# EAGLE board main V4.1 v38 (EAGLE 9.7.0), part 1 of 2
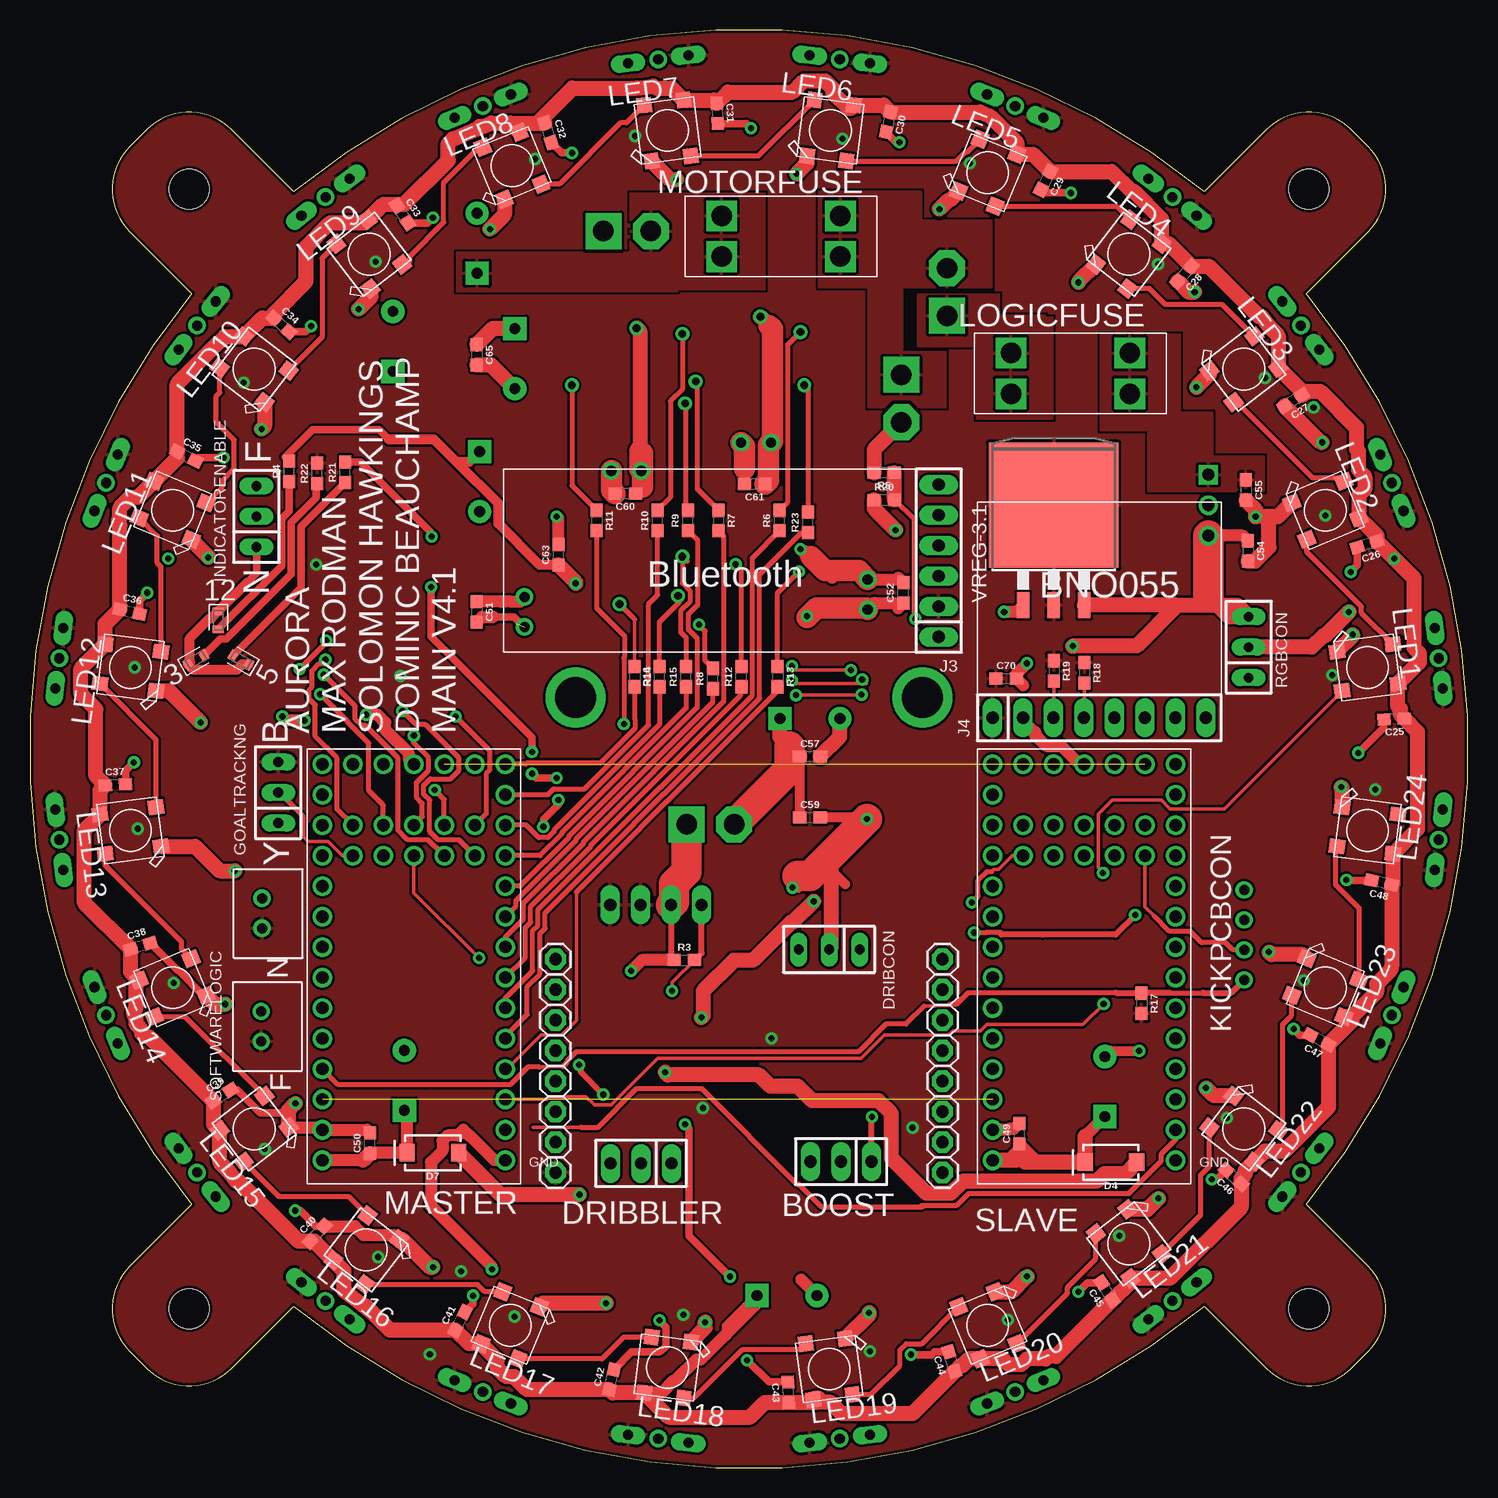
[diagram p0: board, top side]
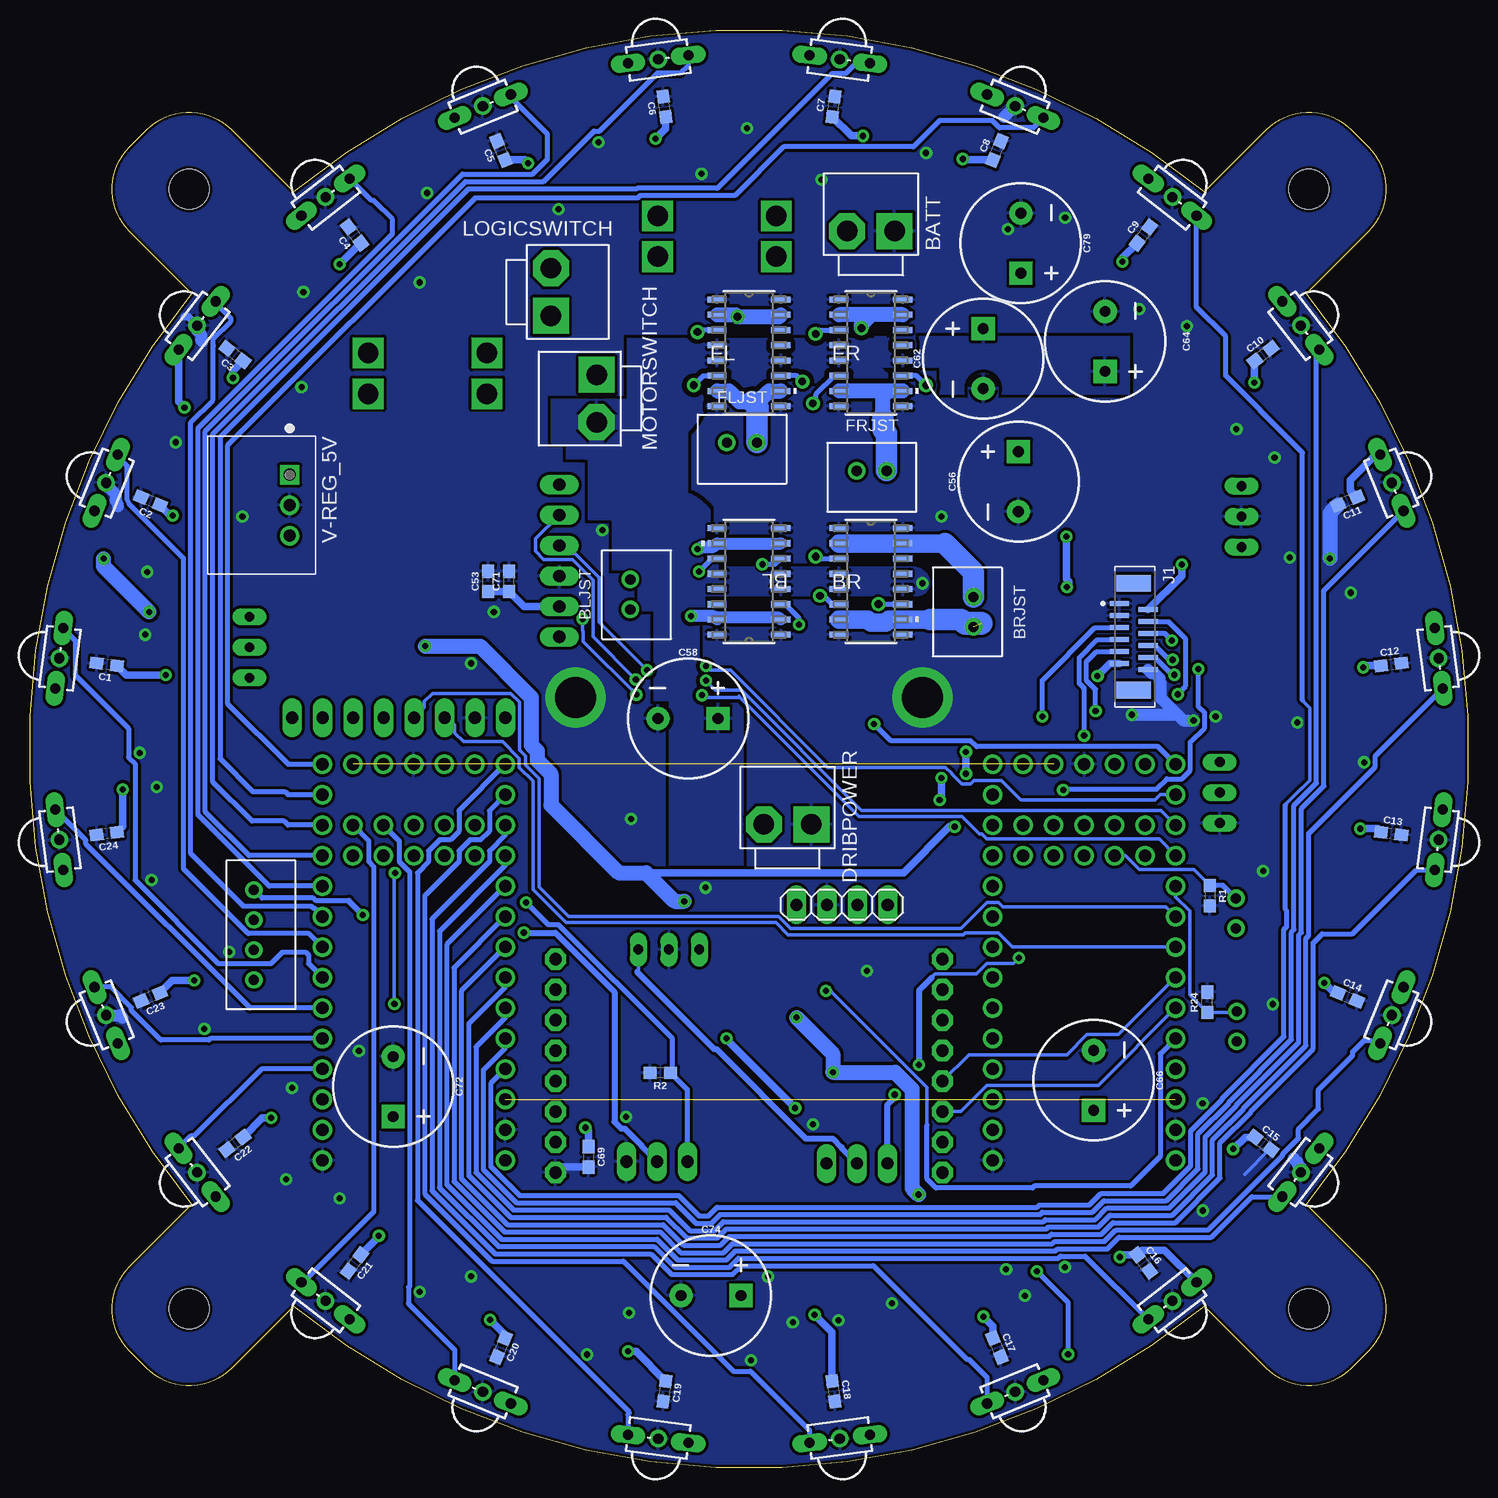
[diagram p1: board, bottom side, seen from below]

Size 119.87 x 119.87 mm. Coordinates in mm from the lower left corner, seen from the top.
Outline: 13.48,21.97 8.32,16.8 arc90 8.32,9.73 9.73,8.32 arc90 16.8,8.32 21.97,13.48 arc79 97.91,13.48 103.07,8.32 arc90 110.14,8.32 111.56,9.73 arc90 111.56,16.8 106.39,21.97 arc79 106.39,97.91 111.56,103.07 arc90 111.56,110.14 110.14,111.56 arc90 103.07,111.56 97.91,106.39 arc79 21.97,106.39 16.8,111.56 arc90 9.73,111.56 8.32,110.14 arc90 8.32,103.07 13.48,97.91 arc79 13.48,21.97
Copper layers (1*16): Top 0.035mm / dielectric 1.5mm / Bottom 0.035mm
Design rules "SparkFun": minimum track width 8mil, minimum drill 20mil, track to track 8mil, track to pad 8mil, pad to pad 8mil, via to via 8mil, smd to smd 8mil, copper to edge 10mil, drill to drill 8mil, minimum pad ring 12mil, minimum via ring 10mil, stop-mask expansion 4mil, vias tented up to drill 25mil, thermal gap 10mil
Holes 3.3 mm at 106.61,13.27 13.27,106.61 13.27,13.27 106.61,106.61

## Footprints (pad centres in the part's own frame; a part is rotated, then mirrored left to right if it is on the bottom)
B2P-VH = drill 1.7 pad 3 square: 1 -1.98,0 | drill 1.7 pad 3 octagon: 2 1.98,0
VNH7070-ASTR = smd 1.6 x 0.508: 1 -2.654,4.445; 2 -2.654,3.175; 3 -2.654,1.905; 4 -2.654,0.635; 5 -2.654,-0.635; 6 -2.654,-1.905; 7 -2.654,-3.175; 8 -2.654,-4.445; 9 2.654,-4.445; 10 2.654,-3.175; 11 2.654,-1.905; 12 2.654,-0.635; 13 2.654,0.635; 14 2.654,1.905; 15 2.654,3.175; 16 2.654,4.445
B2B-XH-A = drill 0.84: 1 0,0; 2 2.5,0
SIP-100-03-40Y = drill 1.016 long: 1 -2.54,0; 2 0,0; 3 2.54,0
0603 = smd 1.1 x 1: 1 -0.85,0; 2 0.85,0
CPOL-RADIAL-5MM-10MM-KIT = drill 0.9 pad 1.93 square: + 2.5,0 | drill 0.9 pad 1.93: - -2.5,0
LEDC1608X55N_FLAT-Y = smd 0.612 x 0.912: A 0.75,0; C -0.75,0
SMA-DIODE = smd 1.27 x 1.47: A -2.15,0; C 2.15,0
SIP-100-03-32Y = drill 0.813 long: 1 -2.54,0; 2 0,0; 3 2.54,0
MINICAST = drill 0.85 long: 1 0,2.54; 3 0,-2.54 | drill 0.85: 2 0,0
TE_1-1734742-2 = smd 0.4 x 1.6: 1 -2.75,-1.2; 2 -2.25,1.2; 3 -1.75,-1.2; 4 -1.25,1.2; 5 -0.75,-1.2; 6 -0.25,1.2; 7 0.25,-1.2; 8 0.75,1.2; 9 1.25,-1.2; 10 1.75,1.2; 11 2.25,-1.2; 12 2.75,1.2 | smd 1.4 x 2.9: S1 -4.45,0; S2 4.45,0
B4B-XH-A = drill 0.84: 1 0,0; 2 2.5,0; 3 5,0; 4 7.5,0
SIP-100-06-40Y = drill 1.016 long: 1 -6.35,0; 2 -3.81,0; 3 -1.27,0; 4 1.27,0; 5 3.81,0; 6 6.35,0
SIP-100-08-40Y = drill 1.016 long: 1 -8.89,0; 2 -6.35,0; 3 -3.81,0; 4 -1.27,0; 5 1.27,0; 6 3.81,0; 7 6.35,0; 8 8.89,0
1X04 = drill 1.016 long: 1 -3.81,0; 2 -1.27,0; 3 1.27,0; 4 3.81,0
WS2812B-NARROW = smd 1.3 x 1.2: 1-VDD 2.35,-1.65; 2-DOUT 2.35,1.65; 3-GND -2.35,1.65; 4-DIN -2.35,-1.65
3568-FUSEHOLDER = drill 1.702 square: 1 0,3.404; 2 0,0; 3 9.906,0; 4 9.906,3.404
MODULE_DEV-15583 = drill 1.02: 0 -7.62,13.97; 1 -7.62,11.43; 2 -7.62,8.89; 3 -7.62,6.35; 3.3V_1 -2.54,-16.51; 3.3V_2 7.62,11.43; 4 -7.62,3.81; 5 -7.62,1.27; 6 -7.62,-1.27; 7 -7.62,-3.81; 8 -7.62,-6.35; 9 -7.62,-8.89; 10 -7.62,-11.43; 11 -7.62,-13.97; 12 -7.62,-16.51; 13 7.62,-16.51; 14 7.62,-13.97; 15 7.62,-11.43; 16 7.62,-8.89; 17 7.62,-6.35; 18 7.62,-3.81; 19 7.62,-1.27; 20 7.62,1.27; 21 7.62,3.81; 22 7.62,6.35; 23 7.62,8.89; 24 -5.08,-11.43; 25 -5.08,-8.89; 26 -2.54,-11.43; 27 -2.54,-8.89; 28 0,-11.43; 29 0,-8.89; 30 2.54,-11.43; 31 2.54,-8.89; 32 5.08,-11.43; 33 5.08,-8.89; G1 -7.62,16.51; G2 0,-16.51; G3 7.62,13.97; ON-OFF 5.08,-16.51; PGM 2.54,-16.51; VBAT -5.08,-16.51; VIN 7.62,16.51
OPENMV3 = drill 1.016 pad 1.778 octagon: 11 1.651,19.304; 12 1.651,16.764; 13 1.651,14.224; 14 1.651,11.684; 15 1.651,9.144; 16 1.651,6.604; 17 1.651,4.064; 18 1.651,1.524; 21 33.909,19.304; 22 33.909,16.764; 23 33.909,14.224; 24 33.909,11.684; 25 33.909,9.144; 26 33.909,6.604; 27 33.909,4.064; 28 33.909,1.524
CONV_V7805-2000 = drill 1 square: 1 -2.54,2.35 | drill 1: 2 0,2.35; 3 2.54,2.35
LINEAR_TO263-3 = smd 1.067 x 2.159: 1 -2.54,-5.791; 2 0,-5.791; 3 2.54,-5.791 | smd 10.8 x 10.41: TAB 0,2.54

## Placement (x,y rotation side)
BATT  B2P-VH-B  [B2P-VH]  49.78,103.12 180 bottom
BL  VNH7070-ASTR  [VNH7070-ASTR]  59.94,73.91 180 bottom
BLJST  [B2B-XH-A]  69.83,71.57 90 bottom
BOOST  F-1X03-SIP-100-40Y  [SIP-100-03-40Y]  67.61,25.55 180 top
BR  VNH7070-ASTR  [VNH7070-ASTR]  49.78,73.91 0 bottom
BRJST  [B2B-XH-A]  41.22,72.61 270 bottom
C1  0.1uF  [0603]  113.48,66.99 172.5 bottom
C2  0.1uF  [0603]  109.83,80.6 157.5 bottom
C3  0.1uF  [0603]  102.78,92.81 142.5 bottom
C4  0.1uF  [0603]  92.81,102.78 127.5 bottom
C5  0.1uF  [0603]  80.6,109.83 112.5 bottom
C6  0.1uF  [0603]  66.99,113.48 97.5 bottom
C7  0.1uF  [0603]  52.89,113.48 82.5 bottom
C8  0.1uF  [0603]  39.27,109.83 67.5 bottom
C9  0.1uF  [0603]  27.06,102.78 52.5 bottom
C10  0.1uF  [0603]  17.1,92.81 37.5 bottom
C11  0.1uF  [0603]  10.05,80.6 202.5 bottom
C12  0.1uF  [0603]  6.4,66.99 7.5 bottom
C13  0.1uF  [0603]  6.4,52.89 352.5 bottom
C14  0.1uF  [0603]  10.05,39.27 337.5 bottom
C15  0.1uF  [0603]  17.1,27.06 322.5 bottom
C16  0.1uF  [0603]  27.06,17.1 307.5 bottom
C17  0.1uF  [0603]  39.27,10.05 292.5 bottom
C18  0.1uF  [0603]  52.89,6.4 277.5 bottom
C19  0.1uF  [0603]  66.99,6.4 262.5 bottom
C20  0.1uF  [0603]  80.6,10.05 247.5 bottom
C21  0.1uF  [0603]  92.81,17.1 232.5 bottom
C22  0.1uF  [0603]  102.78,27.06 217.5 bottom
C23  0.1uF  [0603]  109.83,39.27 202.5 bottom
C24  0.1uF  [0603]  113.48,52.89 187.5 bottom
C25  1uF  [0603]  113.71,62.43 182.5 top
C26  1uF  [0603]  111.47,77 197.5 top
C27  1uF  [0603]  105.3,88.99 212.5 top
C28  1uF  [0603]  96.24,99.55 227.5 top
C29  1uF  [0603]  84.66,107.32 242.5 top
C30  1uF  [0603]  71.54,112.2 257.5 top
C31  1uF  [0603]  57.28,112.92 272.5 top
C32  1uF  [0603]  43.19,111.31 287.5 top
C33  1uF  [0603]  31.04,104.5 302.5 top
C34  1uF  [0603]  20.96,95.29 317.5 top
C35  1uF  [0603]  13.03,84.35 332.5 top
C36  1uF  [0603]  8.31,71.38 347.5 top
C37  1uF  [0603]  7.11,56.97 2.5 top
C38  1uF  [0603]  9.2,43.51 17.5 top
C39  1uF  [0603]  16.01,31.04 32.5 top
C40  1uF  [0603]  23.95,19.54 47.5 top
C41  1uF  [0603]  35.85,12.24 62.5 top
C42  1uF  [0603]  48.49,7.36 77.5 top
C43  1uF  [0603]  63.23,6.32 92.5 top
C44  1uF  [0603]  76.84,8.88 107.5 top
C45  1uF  [0603]  89.78,14.74 122.5 top
C46  1uF  [0603]  100.34,24.27 137.5 top
C47  1uF  [0603]  107.48,35.69 152.5 top
C48  1uF  [0603]  112.68,48.81 167.5 top
C49  0.1uF  [0603]  82.48,27.87 90 top
C50  0.1uF  [0603]  28.35,27.08 90 top
C51  0.1uF  [0603]  37.24,71.37 270 top
C52  0.1uF  [0603]  72.8,72.95 90 top
C53  0.1uF  [0603]  81.69,73.91 90 bottom
C54  22uF  [0603]  101.53,76.45 270 top
C55  10uF  [0603]  101.37,81.53 270 top
C56  470uf  [CPOL-RADIAL-5MM-10MM-KIT]  37.48,82.23 90 bottom
C57  0.1uF  [0603]  65.02,59.3 0 top
C58  470uf  [CPOL-RADIAL-5MM-10MM-KIT]  65.02,62.48 0 bottom
C59  0.1uF  [0603]  65.02,54.22 0 top
C60  0.1uF  [0603]  49.62,81.21 180 top
C61  0.1uF  [0603]  60.41,82 180 top
C62  470uf  [CPOL-RADIAL-5MM-10MM-KIT]  40.41,92.48 90 bottom
C63  0.1uF  [0603]  44.06,76.13 90 top
C64  470uf  [CPOL-RADIAL-5MM-10MM-KIT]  30.25,93.91 270 bottom
C65  0.1uF  [0603]  37.24,92.8 270 top
C66  470uF  [CPOL-RADIAL-5MM-10MM-KIT]  31.2,32.31 270 bottom
C69  0.1uF  [0603]  73.32,25.93 270 bottom
C70  0.1uF  [0603]  81.37,65.81 0 top
C71  0.1uF  [0603]  79.94,73.91 90 bottom
C72  470uF  [CPOL-RADIAL-5MM-10MM-KIT]  89.6,31.8 270 bottom
C74  470uF  [CPOL-RADIAL-5MM-10MM-KIT]  63.11,14.38 0 bottom
C79  470uF  [CPOL-RADIAL-5MM-10MM-KIT]  37.28,102.1 270 bottom
D1  [LEDC1608X55N_FLAT-Y]  15.7,70.67 270 top
D2  [LEDC1608X55N_FLAT-Y]  17.57,67.37 150 top
D3  [LEDC1608X55N_FLAT-Y]  13.83,67.37 30 top
D4  1A/40V/500mV  [SMA-DIODE]  90.1,25.49 180 top
D7  1A/40V/500mV  [SMA-DIODE]  33.58,26.28 180 top
DRIBBLER  F-1X03-SIP-100-40Y  [SIP-100-03-40Y]  50.94,25.39 180 top
DRIBCON  [SIP-100-03-32Y]  66.62,43.22 180 top
DRIBPOWER  [B2P-VH]  56.72,53.66 180 bottom
FL  VNH7070-ASTR  [VNH7070-ASTR]  59.94,92.96 0 bottom
FLJST  [B2B-XH-A]  61.78,85.48 0 bottom
FR  VNH7070-ASTR  [VNH7070-ASTR]  49.78,92.96 0 bottom
FRJST  [B2B-XH-A]  50.96,83.13 0 bottom
GOALTRACKNG  F-1X03-SIP-100-32Y  [SIP-100-03-32Y]  20.69,56.31 90 top
INDICATORENABLE  F-1X03-SIP-100-32Y  [SIP-100-03-32Y]  18.88,79.32 90 top
IR1  TSSP58038  [MINICAST]  117.43,67.51 352.5 bottom
IR2  TSSP58038  [MINICAST]  113.52,82.13 337.5 bottom
IR3  TSSP58038  [MINICAST]  105.94,95.24 322.5 bottom
IR4  TSSP58038  [MINICAST]  95.24,105.94 307.5 bottom
IR5  TSSP58038  [MINICAST]  82.13,113.52 292.5 bottom
IR6  TSSP58038  [MINICAST]  67.51,117.43 277.5 bottom
IR7  TSSP58038  [MINICAST]  52.37,117.43 262.5 bottom
IR8  TSSP58038  [MINICAST]  37.74,113.52 247.5 bottom
IR9  TSSP58038  [MINICAST]  24.64,105.94 232.5 bottom
IR10  TSSP58038  [MINICAST]  13.94,95.24 217.5 bottom
IR11  TSSP58038  [MINICAST]  6.35,82.13 202.5 bottom
IR12  TSSP58038  [MINICAST]  2.44,67.51 187.5 bottom
IR13  TSSP58038  [MINICAST]  2.44,52.37 172.5 bottom
IR14  TSSP58038  [MINICAST]  6.35,37.74 157.5 bottom
IR15  TSSP58038  [MINICAST]  13.94,24.64 142.5 bottom
IR16  TSSP58038  [MINICAST]  24.64,13.94 127.5 bottom
IR17  TSSP58038  [MINICAST]  37.74,6.35 112.5 bottom
IR18  TSSP58038  [MINICAST]  52.37,2.44 97.5 bottom
IR19  TSSP58038  [MINICAST]  67.51,2.44 82.5 bottom
IR20  TSSP58038  [MINICAST]  82.13,6.35 67.5 bottom
IR21  TSSP58038  [MINICAST]  95.24,13.94 52.5 bottom
IR22  TSSP58038  [MINICAST]  105.94,24.64 37.5 bottom
IR23  TSSP58038  [MINICAST]  113.52,37.74 22.5 bottom
IR24  TSSP58038  [MINICAST]  117.43,52.37 7.5 bottom
J1  1-1734742-2  [TE_1-1734742-2]  27.87,69.3 270 bottom
J2  B4B-XH-A  [B4B-XH-A]  101.21,48.19 270 bottom
J3  F-1X06-SIP-100-40Y  [SIP-100-06-40Y]  75.75,75.63 90 top
J4  F-1X08-SIP-100-40Y  [SIP-100-08-40Y]  89.13,62.54 0 top
JP2  [1X04]  52.18,46.95 180 bottom
LED1  WS2812B_5050N  [WS2812B-NARROW]  111.49,66.72 7.5 top
LED2  WS2812B_5050N  [WS2812B-NARROW]  107.98,79.84 22.5 top
LED3  WS2812B_5050N  [WS2812B-NARROW]  101.19,91.59 37.5 top
LED4  WS2812B_5050N  [WS2812B-NARROW]  91.59,101.19 52.5 top
LED5  WS2812B_5050N  [WS2812B-NARROW]  79.84,107.98 67.5 top
LED6  WS2812B_5050N  [WS2812B-NARROW]  66.72,111.49 82.5 top
LED7  WS2812B_5050N  [WS2812B-NARROW]  53.15,111.49 97.5 top
LED8  WS2812B_5050N  [WS2812B-NARROW]  40.18,108.56 112.5 top
LED9  WS2812B_5050N  [WS2812B-NARROW]  28.28,101.19 127.5 top
LED10  WS2812B_5050N  [WS2812B-NARROW]  18.68,91.59 142.5 top
LED11  WS2812B_5050N  [WS2812B-NARROW]  11.9,79.84 157.5 top
LED12  WS2812B_5050N  [WS2812B-NARROW]  8.38,66.72 172.5 top
LED13  WS2812B_5050N  [WS2812B-NARROW]  8.38,53.15 187.5 top
LED14  WS2812B_5050N  [WS2812B-NARROW]  11.9,40.04 202.5 top
LED15  WS2812B_5050N  [WS2812B-NARROW]  18.68,28.28 217.5 top
LED16  WS2812B_5050N  [WS2812B-NARROW]  28.03,18.19 232.5 top
LED17  WS2812B_5050N  [WS2812B-NARROW]  40.04,11.9 247.5 top
LED18  WS2812B_5050N  [WS2812B-NARROW]  53.15,8.38 262.5 top
LED19  WS2812B_5050N  [WS2812B-NARROW]  66.62,8.25 277.5 top
LED20  WS2812B_5050N  [WS2812B-NARROW]  79.84,11.9 292.5 top
LED21  WS2812B_5050N  [WS2812B-NARROW]  91.59,18.68 307.5 top
LED22  WS2812B_5050N  [WS2812B-NARROW]  101.19,28.28 322.5 top
LED23  WS2812B_5050N  [WS2812B-NARROW]  107.98,40.04 337.5 top
LED24  WS2812B_5050N  [WS2812B-NARROW]  111.49,53.15 352.5 top
LOGICFUSE  [3568-FUSEHOLDER]  91.69,92.96 180 top
LOGICSWITCH  B2P-VH-B  [B2P-VH]  76.45,98.04 90 bottom
MASTER  DEV-15583  [MODULE_DEV-15583]  32,42.16 180 top
MOTORFUSE  [3568-FUSEHOLDER]  67.56,104.39 180 top
MOTORSWITCH  B2P-VH-B  [B2P-VH]  72.64,89.15 270 bottom
R1  10k  [0603]  21.52,47.71 270 bottom
R2  10k  [0603]  67.33,32.94 180 bottom
R3  33k  [0603]  54.55,42.34 0 top
R4  1k  [0603]  21.62,83.08 90 top
R5  33k  [0603]  71.21,82.97 180 top
R6  1k  [0603]  62.48,78.99 90 top
R7  1k  [0603]  57.4,78.99 270 top
R8  1k  [0603]  56.92,65.81 90 top
R9  1k  [0603]  54.86,78.99 90 top
R10  1k  [0603]  52.32,78.99 90 top
R11  1k  [0603]  47.24,78.99 270 top
R12  1k  [0603]  59.3,65.97 90 top
R13  1k  [0603]  62.32,65.97 270 top
R14  1k  [0603]  50.41,65.97 270 top
R15  1k  [0603]  54.7,65.97 90 top
R16  1k  [0603]  52.48,65.97 90 top
R17  10k  [0603]  92.65,38.73 270 top
R18  4.7K  [0603]  87.88,66.29 270 top
R19  4.7K  [0603]  85.34,66.45 270 top
R20  10k  [0603]  71.21,80.7 0 top
R21  330  [0603]  26.28,83 90 top
R22  330  [0603]  23.95,82.91 90 top
R23  1k  [0603]  64.86,78.83 90 top
R24  10k  [0603]  21.75,38.82 90 bottom
RGBCON  F-1X03-SIP-100-32Y  [SIP-100-03-32Y]  101.59,68.42 90 top
SLAVE  DEV-15583  [MODULE_DEV-15583]  87.88,42.16 180 top
SOFTWARELOGIC  [B2B-XH-A]  19.27,35.57 90 top
SOFTWAREPOWER  [B2B-XH-A]  19.35,44.99 90 top
U$3  OPENMV3  [OPENMV3]  42.16,23.11 0 top
V-REG_5V  V7805-2000  [CONV_V7805-2000]  100.58,80.26 270 bottom
VREG-3.1  LINEAR_LM1084  [LINEAR_TO263-3]  85.34,77.72 0 top

## Library data of the parts
BATT DRIBPOWER LOGICSWITCH MOTORSWITCH = con-JST VH
BL BR FL FR = VNH7070-ASTR
BLJST BRJST FLJST FRJST SOFTWARELOGIC SOFTWAREPOWER = Connector; CATEGORY: Header; DESCRIPTION: Connector Header Through Hole 2 position 0.098" (2.50mm); MANUFACTURER: JST Sales America Inc.; MPN: B2B-XH-A(LF)(SN); OPERATING_TEMPERATURE: -25°C ~ 85°C; PART_STATUS: ACTIVE; PITCH: 0.098" (2.50mm); ROHS_COMPLIANCE: ROHS3 Compliant; SERIES: XH; SUB_CATEGORY: Rectangular Connectors; TYPE: Header, Male Pin, Board to Cable/Wire, Through Hole
BOOST DRIBBLER DRIBCON GOALTRACKNG INDICATORENABLE J3 J4 RGBCON = con-headers-jp
C1-C24 C49-C55 C57 C59-C61 C63 C65 C69-C71 = SparkFun-Capacitors; PROD_ID: CAP-08390
C25-C48 = SparkFun-Capacitors; PROD_ID: CAP-00810
C56 C58 C62 C64 C66 C72 C74 C79 = SparkFun-Capacitors; PROD_ID: CAP-09538
D1-D3 = LED; CATEGORY: LED; COLOR: YELLOW; DESCRIPTION: CHIP LED FLAT; SUB-CATEGORY: CHIP; TYPE: FLAT_TOP
D4 D7 = Semi; PROD_ID: DIO-08053
IR1-IR24 = IR Receivers
J1 = 12pinveritcalffccon; AVAILABILITY: In Stock; CHECK_PRICES: https://www.snapeda.com/parts/1-1734742-2/TE+Connectivity+AMP+Connectors/view-part/?ref=eda; COMMENT: 1-1734742-2; DESCRIPTION: FPC Series 1mm Pitch 12 Way Straight Female FPC Connector, ZIF Vertical Contact | TE Connectivity 1-1734742-2; EU_ROHS_COMPLIANCE: Compliant; MF: TE Connectivity; MP: 1-1734742-2; PACKAGE: None; PRICE: None; SNAPEDA_LINK: https://www.snapeda.com/parts/1-1734742-2/TE+Connectivity+AMP+Connectors/view-part/?ref=snap
J2 = Connector; CATEGORY: Header; DSECRIPTION: Connector Header Through Hole 4 position 0.098" (2.50mm); MANUFACTURER: JST Sales America Inc.; MPN: B4B-XH-A(LF)(SN); OPERATING_TEMPERATURE: -25 C to 85 C; PART_STATUS: ACTIVE; PITCH: 0.098" (2.50mm); ROHS_COMPLIANCE: ROHS3 Compliant; SERIES: XH; SUB_CATEGORY: Rectangular Connectors; TYPE: Header, Male Pin, Board to Cable/Wire, Through Hole
JP2 = pinhead
LED1-LED24 = RGBLED; AVAILABILITY: Not in stock; CHECK_PRICES: https://www.snapeda.com/parts/WS2812B/Worldsemi/view-part/?ref=eda; DESCRIPTION: Intelligent control LED integrated light source; MF: Worldsemi; MP: WS2812B; PACKAGE: None; PRICE: None; SNAPEDA_LINK: https://www.snapeda.com/parts/WS2812B/Worldsemi/view-part/?ref=snap
LOGICFUSE MOTORFUSE = ROBO
MASTER SLAVE = Teensy 4.0 library; AVAILABILITY: In Stock; CHECK_PRICES: https://www.snapeda.com/parts/DEV-15583/SparkFun+Electronics/view-part/?ref=eda; DESCRIPTION: RT1062 Teensy 4.0 series ARM® Cortex®-M7 MPU Embedded Evaluation Board; MF: SparkFun Electronics; MP: DEV-15583; PACKAGE: None; PRICE: None; PURCHASE-URL: https://www.snapeda.com/api/url_track_click_mouser/?unipart_id=4001229&manufacturer=SparkFun Electronics&part_name=DEV-15583&search_term=None; SNAPEDA_LINK: https://www.snapeda.com/parts/DEV-15583/SparkFun+Electronics/view-part/?ref=snap
R1 R17 R24 = SparkFun-Resistors; PROD_ID: RES-00824
R2 R4 R21 R22 = SparkFun-Resistors; PROD_ID: RES-07856
R3 R6-R16 R23 = SparkFun-Resistors; PROD_ID: RES-15715
R5 R18-R20 = SparkFun-Resistors; PROD_ID: RES-14690
U$3 = OpenMV
V-REG_5V = V7805-2000; MANUFACTURER: CUI INC; PARTREV: 1.03; STANDARD: MANUFACTURER RECOMMENDATIONS
VREG-3.1 = Main

## Nets
3.3V: C1.1 C2.1 C3.1 C4.1 C5.1 C6.1 C7.1 C8.1 C9.1 C10.1 C11.1 C12.1 C13.1 C14.1 C15.1 C16.1 C17.1 C18.1 C19.1 C20.1 C21.1 C22.1 C23.1 C24.1 C53.1 C69.1 C70.1 C71.1 GOALTRACKNG.3 IR1.3 IR2.3 IR3.3 IR4.3 IR5.3 IR6.3 IR7.3 IR8.3 IR9.3 IR10.3 IR11.3 IR12.3 IR13.3 IR14.3 IR15.3 IR16.3 IR17.3 IR18.3 IR19.3 IR20.3 IR21.3 IR22.3 IR23.3 IR24.3 J1.2 J1.11 J3.2 J4.1 JP2.1 JP2.2 R17.2 R18.1 R19.1 R22.2 SOFTWARELOGIC.1 SOFTWAREPOWER.1 U$3.18 VREG-3.1.2 VREG-3.1.TAB
3.3V_1: MASTER.3.3V_1 SLAVE.3.3V_1
3.3V_2: MASTER.3.3V_2 SLAVE.3.3V_2
+5V: C54.1 D4.A D7.A R21.2 RGBCON.3 V-REG_5V.3 VREG-3.1.3
BATTREAD: MASTER.16 R5.1 R20.2
BL_INA: MASTER.7 R8.1
BL_INB: MASTER.5 R12.1
BL_OUTA: BL.2 BL.15 BLJST.1 C52.1
BL_OUTB: BL.7 BL.10 BLJST.2 C52.2
BL_PWM: MASTER.2 R13.2
BNOSCL: J4.3 MASTER.19 R19.2
BNOSDA: J4.4 MASTER.18 R18.2
BOOSTENABLETEENSY: BOOST.3 R2.1 SLAVE.33
BOOSTERENABLEPIN: BOOST.2 J2.1
BR_INA: MASTER.9 R15.1
BR_INB: MASTER.10 R16.1
BR_OUTA: BR.2 BR.15 BRJST.1 C51.1
BR_OUTB: BR.7 BR.10 BRJST.2 C51.2
BR_PWM: MASTER.12 R14.2
BTMRX: J3.5 MASTER.15
BTMTX: J3.4 MASTER.14
CAMMRX: MASTER.20 U$3.15
CAMMTX: MASTER.21 U$3.16
DRIB: DRIBBLER.3 MASTER.29
DRIBMOTOR: DRIBBLER.2 DRIBCON.1
FEEDBACK: J2.3 SLAVE.25
FL_INA: MASTER.4 R6.1
FL_INB: MASTER.3 R23.1
FL_OUTA: C61.1 FL.2 FL.15 FLJST.1
FL_OUTB: C61.2 FL.7 FL.10 FLJST.2
FL_PWM: MASTER.6 R7.2
FR_INA: MASTER.11 R10.1
FR_INB: MASTER.8 R9.1
FR_OUTA: C60.1 FR.2 FR.15 FRJST.1
FR_OUTB: C60.2 FR.7 FR.10 FRJST.2
FR_PWM: MASTER.13 R11.2
GND: BATT.1 BL.1 BL.8 BL.9 BL.16 BOOST.1 BR.1 BR.8 BR.9 BR.16 C1.2 C2.2 C3.2 C4.2 C5.2 C6.2 C7.2 C8.2 C9.2 C10.2 C11.2 C12.2 C13.2 C14.2 C15.2 C16.2 C17.2 C18.2 C19.2 C20.2 C21.2 C22.2 C23.2 C24.2 C25.2 C26.2 C27.2 C28.2 C29.2 C30.2 C31.2 C32.2 C33.2 C34.2 C35.2 C36.2 C37.2 C38.2 C39.2 C40.2 C41.2 C42.2 C43.2 C44.2 C45.2 C46.2 C47.2 C48.2 C49.2 C50.2 C53.2 C54.2 C55.2 C56.- C57.2 C58.- C59.2 C62.- C63.2 C64.- C65.2 C66.- C69.2 C70.2 C71.2 C72.- C74.- C79.- DRIBCON.2 DRIBPOWER.1 FL.1 FL.8 FL.9 FL.16 FR.1 FR.8 FR.9 FR.16 GOALTRACKNG.1 INDICATORENABLE.2 IR1.2 IR2.2 IR3.2 IR4.2 IR5.2 IR6.2 IR7.2 IR8.2 IR9.2 IR10.2 IR11.2 IR12.2 IR13.2 IR14.2 IR15.2 IR16.2 IR17.2 IR18.2 IR19.2 IR20.2 IR21.2 IR22.2 IR23.2 IR24.2 J1.1 J1.3 J1.12 J3.3 J4.2 JP2.3 LED1.3-GND LED2.3-GND LED3.3-GND LED4.3-GND LED5.3-GND LED6.3-GND LED7.3-GND LED8.3-GND LED9.3-GND LED10.3-GND LED11.3-GND LED12.3-GND LED13.3-GND LED14.3-GND LED15.3-GND LED16.3-GND LED17.3-GND LED18.3-GND LED19.3-GND LED20.3-GND LED21.3-GND LED22.3-GND LED23.3-GND LED24.3-GND MASTER.G1 MASTER.G2 MASTER.G3 R1.2 R2.2 R3.1 R20.1 R24.2 SLAVE.G1 SLAVE.G2 SLAVE.G3 U$3.28 V-REG_5V.2 VREG-3.1.1
GOALTRACKING: GOALTRACKNG.2 MASTER.33
IR1: IR1.1 SLAVE.5
IR2: IR2.1 SLAVE.6
IR3: IR3.1 SLAVE.7
IR4: IR4.1 SLAVE.8
IR5: IR5.1 SLAVE.9
IR6: IR6.1 SLAVE.10
IR7: IR7.1 SLAVE.11
IR8: IR8.1 SLAVE.12
IR9: IR9.1 SLAVE.23
IR10: IR10.1 SLAVE.22
IR11: IR11.1 SLAVE.21
IR12: IR12.1 SLAVE.20
IR13: IR13.1 SLAVE.19
IR14: IR14.1 SLAVE.18
IR15: IR15.1 SLAVE.17
IR16: IR16.1 SLAVE.16
IR17: IR17.1 SLAVE.15
IR18: IR18.1 SLAVE.14
IR19: IR19.1 SLAVE.13
IR20: IR20.1 SLAVE.26
IR21: IR21.1 SLAVE.24
IR22: IR22.1 SLAVE.2
IR23: IR23.1 SLAVE.3
IR24: IR24.1 SLAVE.4
KICK: J2.4 MASTER.23 R17.1
LOGICVCC: C55.1 LOGICFUSE.1 LOGICFUSE.2 V-REG_5V.1
LS0: J1.4 MASTER.30
LS1: J1.5 MASTER.24
LS2: J1.6 MASTER.26
LS3: J1.7 MASTER.28
LSOUT1: J1.8 MASTER.32
LSOUT2: J1.9 MASTER.25
LSOUT3: J1.10 MASTER.27
MOTORVCC: BL.4 BL.5 BL.12 BR.4 BR.5 BR.12 C56.+ C57.1 C58.+ C59.1 C62.+ C63.1 C64.+ C65.1 DRIBPOWER.2 FL.4 FL.5 FL.12 FR.4 FR.5 FR.12 MOTORSWITCH.2 R4.2 R5.2
MRX: MASTER.0
MTEENSYVIN: C50.1 C66.+ D7.C MASTER.VIN
MTX: SLAVE.0
N$1: LOGICSWITCH.2 MOTORFUSE.1 MOTORFUSE.2 MOTORSWITCH.1
N$2: D1.C D2.C D3.C INDICATORENABLE.1
N$3: FL.3 R6.2
N$4: D1.A R4.1
N$5: LOGICFUSE.3 LOGICFUSE.4 LOGICSWITCH.1
N$6: D2.A R21.1
N$7: FL.6 R23.2
N$8: FL.11 R7.1
N$9: FR.3 R10.2
N$10: FR.11 R11.1
N$11: FR.6 R9.2
N$12: BL.3 R8.2
N$13: BL.11 R13.1
N$14: BL.6 R12.2
N$15: BR.3 R15.2
N$16: BR.11 R14.1
N$17: BR.6 R16.2
N$18: D3.A R22.1
N$19: LED19.2-DOUT LED20.4-DIN
N$20: LED23.2-DOUT LED24.4-DIN
N$21: LED22.2-DOUT LED23.4-DIN
N$22: LED21.2-DOUT LED22.4-DIN
N$23: LED18.2-DOUT LED19.4-DIN
N$24: LED15.2-DOUT LED16.4-DIN
N$25: LED3.2-DOUT LED4.4-DIN
N$26: LED9.2-DOUT LED10.4-DIN
N$27: LED10.2-DOUT LED11.4-DIN
N$30: LED12.2-DOUT LED13.4-DIN
N$31: LED13.2-DOUT LED14.4-DIN
N$32: LED14.2-DOUT LED15.4-DIN
N$33: LED6.2-DOUT LED7.4-DIN
N$34: LED8.2-DOUT LED9.4-DIN
N$35: LED16.2-DOUT LED17.4-DIN
N$36: LED5.2-DOUT LED6.4-DIN
N$37: LED4.2-DOUT LED5.4-DIN
N$38: LED2.2-DOUT LED3.4-DIN
N$39: LED1.2-DOUT LED2.4-DIN
N$40: LED11.2-DOUT LED12.4-DIN
N$41: LED7.2-DOUT LED8.4-DIN
N$46: DRIBCON.3
N$50: LED17.2-DOUT LED18.4-DIN
N$55: LED20.2-DOUT LED21.4-DIN
NO-THING: DRIBBLER.1
NOTHING: RGBCON.1
NOTING: INDICATORENABLE.3
PHOTOGATE: JP2.4 MASTER.22 R3.2
RGBOUT: LED1.4-DIN MASTER.1
RGBVIN: C25.1 C26.1 C27.1 C28.1 C29.1 C30.1 C31.1 C32.1 C33.1 C34.1 C35.1 C36.1 C37.1 C38.1 C39.1 C40.1 C41.1 C42.1 C43.1 C44.1 C45.1 C46.1 C47.1 C48.1 C74.+ LED1.1-VDD LED2.1-VDD LED3.1-VDD LED4.1-VDD LED5.1-VDD LED6.1-VDD LED7.1-VDD LED8.1-VDD LED9.1-VDD LED10.1-VDD LED11.1-VDD LED12.1-VDD LED13.1-VDD LED14.1-VDD LED15.1-VDD LED16.1-VDD LED17.1-VDD LED18.1-VDD LED19.1-VDD LED20.1-VDD LED21.1-VDD LED22.1-VDD LED23.1-VDD LED24.1-VDD RGBCON.2
SOFTWARELOGIC: MASTER.17 R24.1 SOFTWARELOGIC.2
SOFTWAREPOWER: MASTER.31 R1.1 SOFTWAREPOWER.2
STEENSYVIN: C49.1 C72.+ D4.C SLAVE.VIN
VBAT: MASTER.VBAT SLAVE.VBAT
VCC: BATT.2 C79.+ MOTORFUSE.3 MOTORFUSE.4
VIN: U$3.27